# Altium PCB PCB2.PcbDoc
Units mil, origin at the board's own origin, x right, y up, seen from the top; angles counter-clockwise.
Board outline 10955.05 x 6878.87 mil, 2 copper layers (Top Layer, Bottom Layer); 48 components, 33 nets, 223 pads, 8 vias.
Unrouted connection lines stored in the file: 1.
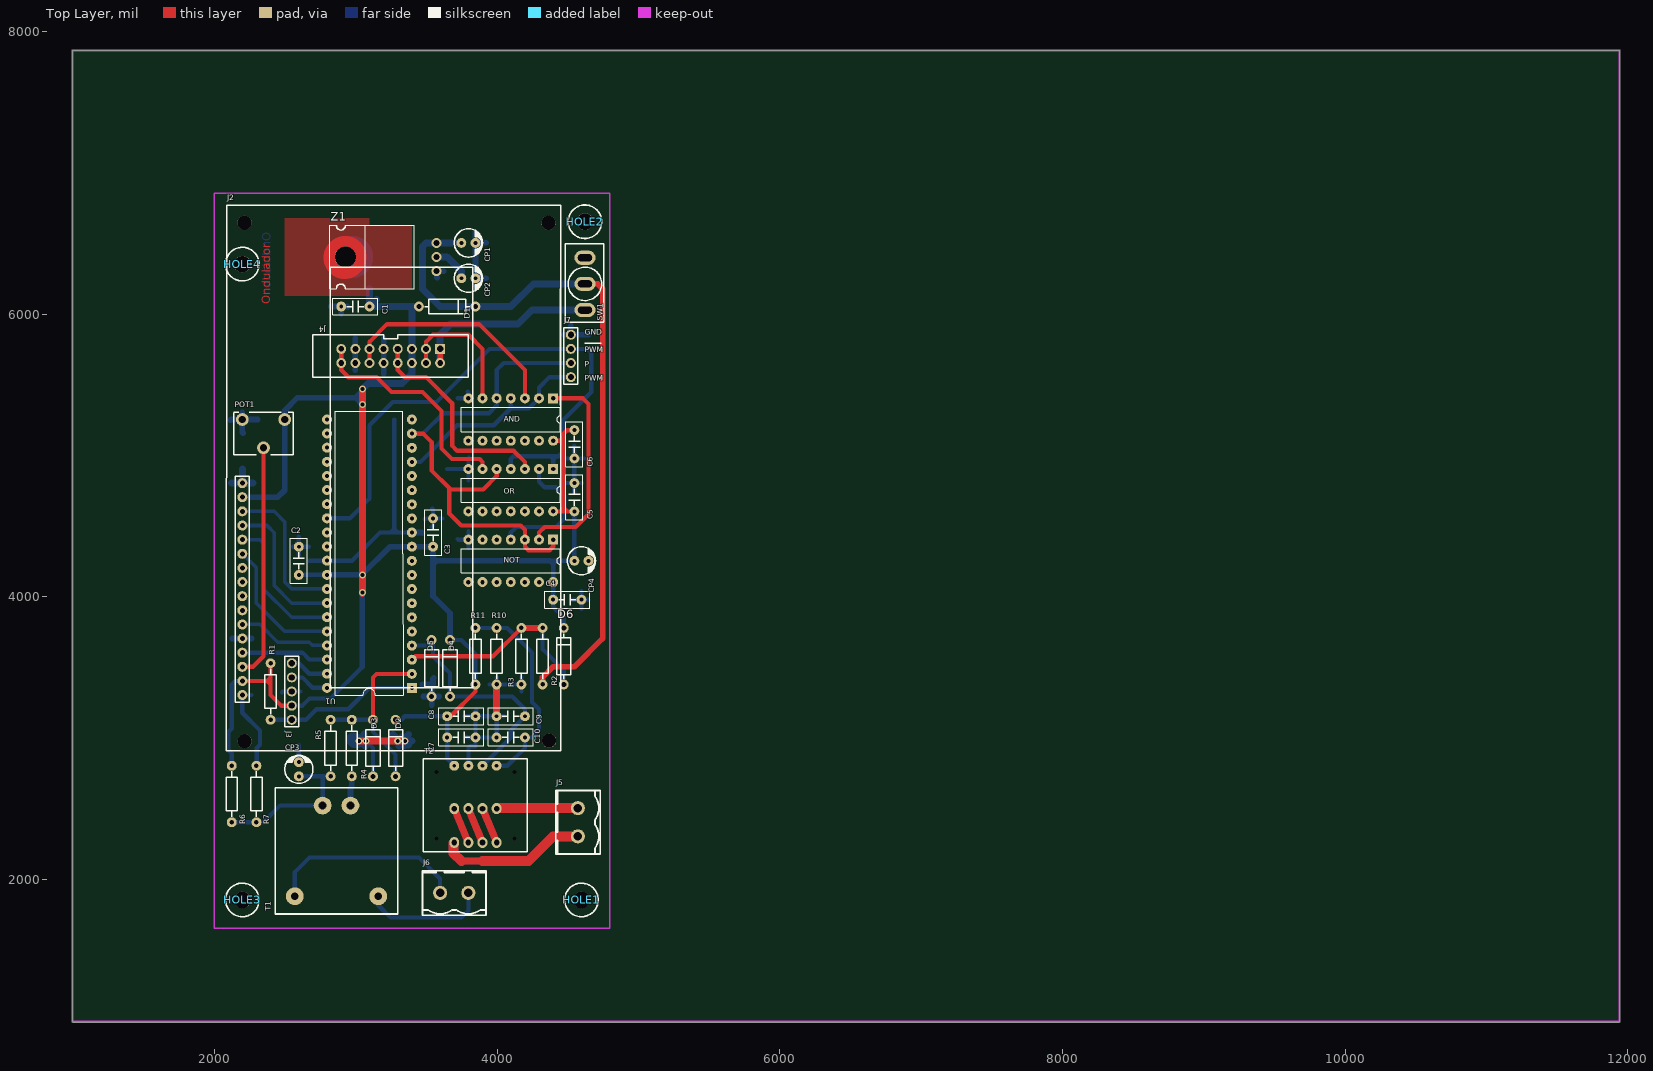
[diagram p0: Top Layer view]
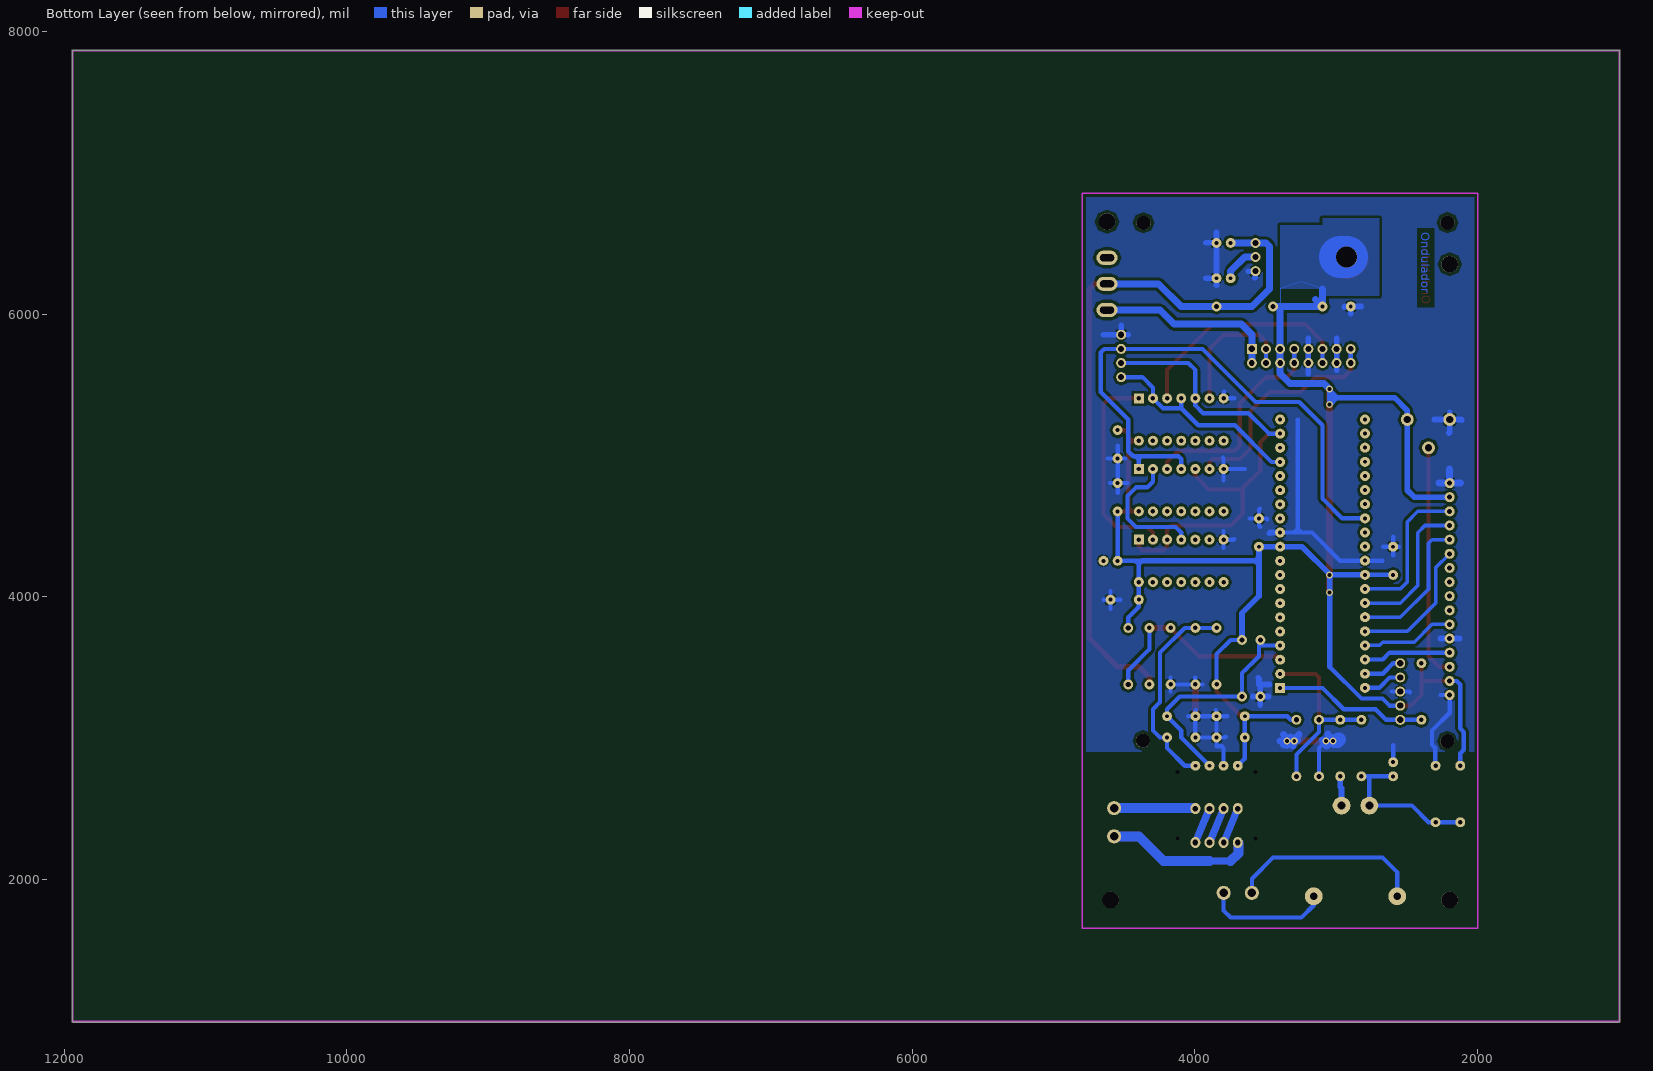
[diagram p1: Bottom Layer view, seen from below]

## Layer stack, top to bottom
Top Solder: solder mask 0.4, Solder Resist, Dk 3.5
Top Layer: signal copper 1.4
Dielectric 1: dielectric 12.6, FR-4, Dk 4.8
Bottom Layer: signal copper 1.4
Bottom Solder: solder mask 0.4, Solder Resist, Dk 3.5

## Board outline
991.18,996.73 cw(c994.98,1000) 989.97,1000 989.97,7865 cw(c994.98,7865) 994.98,7870.02 11940,7870.02 cw(c11940,7865) 11945.01,7865 11945.01,996.16 cw(c11940,996.16) 11940,991.15 996.16,991.15 cw(c996.16,996.16)

## Design rules (kind name [scope] priority, off if disabled: settings)
Clearance [All] p1: gap=20
PolygonConnect [All] p1: connectstyle=Relief reliefconductorwidth=10 reliefentries=4 polygonreliefangle="90 Angle" airgapwidth=10
RoutingVias [All] p1: holewidth=28 width=50 viastyle="Through Hole" minholewidth=28 minwidth=50 maxholewidth=28 maxwidth=50
SolderMaskExpansion [All] p1: expansion=4
UnpouredPolygon [All] p1: allowunpoured=FALSE
Width [All] p1: maxlimit=300 minlimit=15 preferedwidth=35
29 further rules are at their usual default settings.

## Components (designator, comment, footprint, x,y, rotation, side; value= is the part's Value field where it differs from the comment)
AND "I-7408" DIP14 4395,5405 r270 top
C1 "C" C2_200MILS 3095,6055 r180 top
C2 "C" C2_200MILS 2595,4155 r90 top
C3 "C" C2_200MILS 3545,4355 r90 top
C4 "C" C2_200MILS 4395,3980 r0 top
C5 "C" C2_200MILS 4545,4605 r90 top
C6 "C" C2_200MILS 4545,5180 r270 top
C7 "C" C2_200MILS 3645,3005 r0 top
C8 "47nF" C2_200MILS 3645,3155 r0 top
C9 "4.7nF" C2_200MILS 3995,3155 r0 top
C10 "47nF" C2_200MILS 4195,3005 r180 top
CP1 "CP" CP1_D5I5 3745,6505 r0 top
CP2 "CP" CP1_D5I5 3745,6255 r0 top
CP3 "CP" CP1_D5I5 2595,2730 r90 top
CP4 "CP" CP1_D5I5 4545,4255 r0 top
D1 "D" DO41 3445,6055 r0 top
D2 "D" DO41 3280,2730 r90 top
D3 "D" DO41 3120,2730 r90 top
D4 "D" DO41 3665,3295 r90 top
D5 "D" DO41 3535,3295 r90 top
D6 "D" DO41 4470,3380 r90 top
HOLE1 "HOLE" HOLE3_D6 4595,1855 r90 top
HOLE2 "HOLE" HOLE3_D6 4620,6655 r90 top
HOLE3 "HOLE" HOLE3_D6 2195,1855 r90 top
HOLE4 "HOLE" HOLE3_D6 2195,6355 r90 top
J2 "O_LCD_petit" O_LCDPETIT 2195,3305 r90 top
J3 "ICSP" CON5_2I54V 2545,3130 r180 top
J4 "CON16_2headers" CON16-2HEADERS 3595,5755 r270 top
J5 "CON2" CON2_5I08V_CP 4570,2505 r270 top
J6 "CON2" CON2_5I08V_CP 3795,1905 r180 top
J7 "CON4" CON4_2I54V 4520,5555 r180 top
NOT "I-7404" DIP14 4395,4405 r270 top
OR "I-7432" DIP14 4395,4905 r270 top
POT1 "POT1" PT15V 2495,5255 r180 top
R1 "R" R1/4 2395,3530 r270 top
R2 "R" R1/4 4320,3380 r90 top
R3 "R" R1/4 4170,3780 r270 top
R4 "R" R1/4 2970,2730 r90 top
R5 "R" R1/4 2820,3130 r270 top
R6 "R" R1/4 2120,2805 r270 top
R7 "R" R1/4 2295,2405 r90 top
R10 "R" R1/4 3995,3380 r90 top
R11 "R" R1/4 3845,3780 r270 top
SW1 "SW" SW1SPDT 4620,6030 r90 top
T1 "TRAFO_1P2S" TR_0.35/1/12 3295,1755 r90 top
T2 "Transducer 5-20A" "HXS 20-NP" 3795,2805 r0 top
U1 "I-PIC18F44K20" DIP40 3395,3355 r180 top
Z1 "Z-78MXX" TO220GDS_pla 3570,6505 r90 top

## Footprints (in the part's own frame and the unit in brackets; to place one, negate y for a bottom-side part, rotate by r counter-clockwise, add the part's x,y. Pads: shape width x height; smd on the part's side, far side on the other; paste and mask are expansions set on the pad)
C2_200MILS [mil]
  round 70 hole 27.56: 1(0,0) 2(200,0)
  silkscreen extent -60,-60 260,60
CON2_5I08V_CP [mm]
  round 2.54 hole 1.5: 1(0,0) 2(5.08,0)
  silkscreen extent -3.15,-4 8.24,4
CON4_2I54V [mm]
  round 1.8 hole 1.1: 1(0,0) 2(0,-2.54) 3(0,-5.08) 4(0,-7.62)
  silkscreen extent -1.27,-8.89 1.27,1.27
CON5_2I54V [mm]
  round 1.8 hole 1.1: 1(0,0) 2(0,-2.54) 3(0,-5.08) 4(0,-7.62) 5(0,-10.16)
  silkscreen extent -1.27,-11.43 1.27,1.27
CON16-2HEADERS [mil]
  rect 70.87x70.87 hole 47.24: 1(0,0)
  round 70 hole 40: 2(100,0) 4(100,-100) 6(100,-200) 8(100,-300) 10(100,-400) 12(100,-500) 14(100,-600) 15(0,-700) 16(100,-700)
  round 70.87 hole 43.31: 3(0,-100) 5(0,-200) 7(0,-300) 9(0,-400) 11(0,-500) 13(0,-600)
  silkscreen extent -100,-900 200,200
CP1_D5I5 [mil]
  round 70 hole 27.56: 1(0,0) 2(100,0)
  silkscreen extent -50,-100 150,100
DIP14 [mm]
  rect 1.8x1.8 hole 0.8: 1(0,0)
  round 1.8 hole 0.8: 2(0,-2.54) 3(0,-5.08) 4(0,-7.62) 5(0,-10.16) 6(0,-12.7) 7(0,-15.24) 8(7.62,-15.24) 9(7.62,-12.7) 10(7.62,-10.16) 11(7.62,-7.62) 12(7.62,-5.08) 13(7.62,-2.54) 14(7.62,0)
  silkscreen extent 1.63,-16.51 5.99,1.27
DIP40 [mm]
  rect 1.8x1.8 hole 0.7: 1(0,0)
  round 1.8 hole 0.7: 2(0,-2.54) 3(0,-5.08) 4(0,-7.62) 5(0,-10.16) 6(0,-12.7) 7(0,-15.24) 8(0,-17.78) 9(0,-20.32) 10(0,-22.86) 11(0,-25.4) 12(0,-27.94) 13(0,-30.48) 14(0,-33.02) 15(0,-35.56) 16(0,-38.1) 17(0,-40.64) 18(0,-43.18) 19(0,-45.72) 20(0,-48.26) 21(15.24,-48.26) 22(15.255,-45.745) 23(15.255,-43.205) 24(15.255,-40.665) 25(15.255,-38.125) 26(15.255,-35.585) 27(15.255,-33.045) 28(15.255,-30.505) 29(15.255,-27.965) 30(15.255,-25.425) 31(15.255,-22.885) 32(15.255,-20.345) 33(15.255,-17.805) 34(15.255,-15.265) 35(15.255,-12.725) 36(15.255,-10.185) 37(15.255,-7.645) 38(15.255,-5.105) 39(15.255,-2.565) 40(15.255,-0.025)
  silkscreen extent 1.58,-49.75 13.78,1.28
DO41 [mil]
  round 70 hole 36: 1(0,0) 2(400,0)
  silkscreen extent 40,-50 360,50
HOLE3_D6 [mm]
  round 3 hole 3 unplated: 1(0,0)
  silkscreen extent -3.02,-3.02 3.02,3.01
"HXS 20-NP" [mm]
  round 0 hole 0.7: 0(-5.73,-13.1) 0(-5.73,-1.1) 0(8.27,-13.1) 0(8.27,-1.1)
  oval 1.778x2 hole 1: 1(-2.54,-13.8) 2(-2.54,-7.7) 3(0,-13.8) 4(0,-7.7) 5(2.54,-13.8) 6(2.54,-7.7) 7(5.08,-13.8) 8(5.08,-7.7)
  round 1.778 hole 0.7: 9(-2.54,0) 10(0,0) 11(2.54,0) 12(5.08,0)
  silkscreen extent -8.08,-15.45 10.62,1.25
O_LCDPETIT [mm]
  round 2.54 hole 2.54 unplated: 0(-8.3,-0.425) 0(-8.2,-55.15) 0(84.9,-55.05) 0(84.915,-0.399)
  round 1.8 hole 0.9: 1(0,0) 2(2.54,0) 3(5.08,0) 4(7.62,0) 5(10.16,0) 6(12.7,0) 7(15.24,0) 8(17.78,0) 9(20.32,0) 10(22.86,0) 11(25.4,0) 12(27.94,0) 13(30.48,0) 14(33.02,0) 15(35.575,0) 16(38.1,0)
  silkscreen extent -10.05,-57.2 88.08,2.85
PT15V [mil]
  round 90 hole 51.18: 1(0,0) 2(150,200) 3(300,0)
  silkscreen extent -59,-51 360,248
R1/4 [mil]
  round 70 hole 32: 1(0,0) 2(400,0)
  silkscreen extent 40,-40 360,40
SW1SPDT [mil]
  oval 100x150 hole 50 slot 100 at 90 deg: 1(0,0) 2(185,0) 3(370,0)
  silkscreen extent -88,-133 470,138
TO220GDS_pla [mm]
  round 1.8 hole 1.1: 1(0,0) 2(-5.08,0) 3(-2.54,0)
  round 3.78 hole 3.78 unplated: 3(-2.54,16.4)
  silkscreen extent -8.2,4 3.16,19.2
TR_0.35/1/12 [mm]
  round 3.2 hole 1.4: 1(3.201,18.5) 2(19.501,13.5) 3(3.201,3.5) 4(19.501,8.5)
  silkscreen extent 0,0 22.7,22

## Part data
AND: "Cuadruple 2 input Schmitt trigger NAND gate"
C1 C2 C3 C4 C5 C6 C7: ";C?;C1206;C2_25x7i5;C4_15x5 ;C0805 ;Condensador baja potencia ;2"
C8 C9 C10: library part C, ";C?;C1206;C2_25x7i5;C4_15x5 ;C0805 ;Condensador baja potencia ;2"
CP1 CP2 CP3 CP4: ";CP? ;CP1_D5i5 ;CP2_D10i5 ;CP2_D13 ;CP4_D36 ;Condensador polarizado ;3"
D1 D2 D3 D4 D5 D6: ";D? ;SOD80;DO41 ;melf ;minimelf ; Diodo de señal o baja potencia ;8"
HOLE1 HOLE2 HOLE3 HOLE4: ";HOLE? ;HOLE3_D6 ; ; ;Agujero ;20"
J3: library part CON5, ";J? ;CON5 ;CON5_2i54VE_JST_B2PVH ;CON5_7I62_STL960-HG-3 ;CON5_2I54V;Conector de 5 pins simples ;17"
J4: ";J? ;CON5 ;CON5_2i54VE_JST_B2PVH ;CON5_7I62_STL960-HG-3 ;CON5_2I54V;Conector de 5 pins simples ;17"
J5 J6: ";J? ;CON2 ;CON2_2i54VE_JST_B2PVH ;CON2_7I62_STL960-HG-3 ;CON2_2I54V ;Conector de 2 pins simples ;17"
J7: ";J? ;CON4 ;CON4_2i54VE_JST_B2PVH ;CON4_7I62_STL960-HG-3 ;CON4_2I54V ;Conector de 4 pins simples ;17"
NOT: ";U? ;DIP-14 ; ; ; ;6xInversor trigger smith ;18"
OR: ";U? ;SOIC14 ; ; ; ; NOR x 4 ;18"
POT1: ";PT? ;PTV1 ;PT15V ;PTH ;PTH1 ;Potenciometro generico ;1"
R1 R2 R3 R4 R5 R6 R7 R10 R11: ";R? ;R1206 ;R1/4 ;R1/2 ;R0805 ;Resistencia baja potencia (<=1/2W) ;1"
SW1: ";SW? ; ; ; ; ;Switch ;"
T1: ";T? ;TR-TOR1P-2S ; ; ; ;Transformador con 2 secundarios \"2part\" ;6"
Z1: ";Z? ;TO220 ;SOT233 ;TO220H_2COM ; ;Regulador Lineal ;11"

## Via types
v1: diameter 50, hole 28, Top Layer to Bottom Layer, 8 vias

## Nets (pads, with @x,y where several pads share a name; then routed paths per layer and width w, separated by ;. In a path a pad name is that pad's centre, name@x,y a point inside that pad or via, vN(x,y) a via of type N, cw(c..) or ccw(c..) an arc to the next point about the centre after c; other vN are vias at no path point)
+5V: AND.14 C1.1 C2.1 C3.1 C4.1 C5.1 C6.1 C7.1 C8.1 CP2.1 CP4.1 D1.1 D2.2 D4.2 D6.2 J2.2 J2.15 J3.2 J4.5 J4.6 NOT.14 OR.14 POT1.1 R1.1 R6.1 R11.2 T2.9 U1.11 U1.32 Z1.3 | length 13690.1
  Top Layer w30: J2.2 2370,3405 ; R1.1 2395,3430 ; J3.2 2470,3230 2395,3305 2395,3380 ; C8.1 3670,3155 3845,3330 R11.2 ; OR.14 4445,4605 ; AND.14 4445,5105 ; C5.1 4495,4605 ; C6.1 4495,5180 4470,5155 4470,5130 ; 2370,3405 2395,3380 ; 2370,3405 2395,3405 ; 2370,3405 2395,3430 ; 2395,3380 2395,3405 ; 2395,3405 2395,3430 ; 4445,4605 4470,4630 ; 4445,4605 4495,4605 ; 4445,5105 4470,5080 ; 4445,5105 4470,5130 ; 4470,4630 4495,4605 ; 4470,4630 4470,5080 ; 4470,5080 4470,5130
  Top Layer w40: v1@3045,4020 v1(3045,4030)
  Top Layer w50: v1(3045,4030) v1(3045,4155.98) v1(3045,5360) v1(3045,5470)
  Top Layer w300: Z1.3@2919.33,6400 Z1.3@2924.33,6405
  Bottom Layer w30: R6.1 2120,2892.5 2095,2917.5 2095,3042.5 2120,3067.5 2120,3380 2145,3405 J2.2 ; J3.2 2620,3230 2670,3280 2820,3280 3045,3505 ; C2.1 2595.98,4155.98 U1.32 ; D2.2@3270,3130.59 3320.59,3130.59 3345,3155 C8.1 C7.1 3645,2855 T2.9 ; D4.2 3745,3695 3845,3595 R11.2 ; D6.2@4470,3805 4470,3855 4395,3930 C4.1 NOT.14 4395,4230 ; C5.1 CP4.1 4420,4255 ; 4395,4230 4370,4255 4420,4255 ; 4395,4230 4420,4255
  Bottom Layer w40: J2.15 2445.59,4705.59 2495,4755 POT1.1 2495,5320 2585,5410 2995,5410 ; U1.32 v1(3045,4155.98) 3045,3505 ; v1@3042.99,4157.99 3240,4355 U1.11 C3.1 3545,4280 ; v1(3045,5470) v1@3045,5460 ; D4.2 3665,3885 3545,4005 3545,4230 ; 4370,4255 3570,4255 ; 2995,5410 v1@3045,5460 ; 2995,5410 3045,5410 ; 2995,5410 v1(3045,5360) 3045,5410 ; 3045,5410 v1@3045,5460 ; 3545,4230 3545,4255 ; 3545,4230 3570,4255 ; 3545,4255 3545,4280 ; 3545,4255 3570,4255 ; 3545,4280 3570,4255
  Bottom Layer w50: v1(3045,5470) 3085,5510 3325,5510 3395,5580 J4.6 J4.5 3395,6055 ; 3095,6180 C1.1 ; 3145,6105 C1.1 ; D1.1 3395,6055 ; Z1.3@3570,6405 3645,6405 3745,6305 CP2.1 ; C1.1 3395,6055
  Bottom Layer w300: Z1.3@2924.33,6405 Z1.3@2970,6405
+12SW: CP1.1 D1.2 R2.1 SW1.2 Z1.1 | length 5056.8
  Top Layer w40: R2.1 4320,3430 4395,3505 4545,3505 4745,3705 4745,6180 4710,6215 SW1.2
  Bottom Layer w50: CP1.1 Z1.1 3495,6505 3470,6480 3470,6180 3595,6055 3720.59,6055 4095,6055 4255,6215 SW1.2
+12V: J4.1 J4.2 SW1.1 | length 1397.5
  Top Layer w40: J4.2 J4.1
  Bottom Layer w40: J4.2 J4.2@3595,5676.21
  Bottom Layer w50: J4.2@3595,5676.21 J4.1 3595,5855 3670,5930 4145,5930 4245,6030 SW1.1
A: AND.6 J4.3 J4.4 | length 1062.1
  Top Layer w30: J4.4 J4.3 3495,5805 3545,5855 3795,5855 3895,5755 AND.6
  Bottom Layer w30: J4.4 J4.3
AN12V: D6.1 R2.2 R3.1 U1.3 | length 1480.3
  Top Layer w30: U1.3 3420,3580 3970,3580 R3.1
  Top Layer w40: R3.1 R2.2
  Bottom Layer w30: R2.2 4320,3630 4470,3480 D6.1
AN230: D2.1 D3.2 R4.2 R5.1 U1.2 | length 1351.9
  Top Layer w30: D3.2@3120,3130.59 3120,3430 3145,3455 U1.2
  Bottom Layer w30: R5.1 2840.71,3130 2841.3,3130.59 3120,3130.59 3120,3044.33 3280,2884.33 D2.1
B: J4.15 J4.16 OR.6 | length 1724.5
  Top Layer w30: J4.15 J4.16 2895,5605 2945,5555 3145,5555 3250,5450 3470,5450 3605,5315 3605,5050 3679.57,4975.43 3824.17,4975.43 3824.61,4975 3875,4975 3895,4955 OR.6
  Bottom Layer w30: J4.16 J4.15
C: AND.3 J4.11 J4.12 | length 1711.4
  Top Layer w30: J4.12 J4.11@3095,5730 ; J4.11 3095,5805 3220,5930 3870,5930 4195,5605 AND.3
  Bottom Layer w30: J4.12 J4.11
CONT: J2.3 POT1.2 | length 1656.1
  Top Layer w30: J2.3 2270,3505 2345,3580 POT1.2
D: J4.7 J4.8 OR.3 | length 1645.6
  Top Layer w30: J4.7 J4.8 3295,5605 3345,5555 3495,5555 3680,5370 3680,5070 3715.43,5034.57 3824.17,5034.57 ; 3824.61,5035 3824.17,5034.57 ; OR.3 4195,4955 4115.43,5034.57 3824.17,5034.57
  Bottom Layer w30: J4.8 J4.7
D0: J2.14 U1.33 | length 1075.8
  Bottom Layer w25: J2.14 2420,4605 2495,4530 2495,4105 2544.02,4055.98 U1.33
D1: J2.13 U1.34 | length 1047.1
  Bottom Layer w25: J2.13 2370,4505 2420,4455 2420,4080 2544.02,3955.98 U1.34@2795,3955.98
D2: J2.12 U1.35 | length 1017.2
  Bottom Layer w25: J2.12 2320,4405 2345,4380 2345,4055 2544.02,3855.98 U1.35
D3: J2.11 U1.36 | length 973.3
  Bottom Layer w25: J2.11 2295,4205 2295,3955 2494.02,3755.98 U1.36
E: J2.6 U1.37 | length 661.1
  Bottom Layer w25: J2.6 2320,3805 2445,3680 2670,3680 2694.02,3655.98 U1.37
GND: AND.7 C1.2 C2.2 C3.2 C4.2 C5.2 C6.2 C7.2 C8.2 C9.1 C10.2 CP1.2 CP2.2 CP3.2 CP4.2 D3.1 D5.1 J2.1 J2.5 J2.16 J3.3 J4.9 J4.10 J4.13 J4.14 J7.4 NOT.7 OR.7 POT1.3 R3.2 R7.2 R10.1 T2.10 U1.12 U1.31 Z1.2 | length 10151.6
  Top Layer w50: v1(3020,2980) v1(3070,2980) v1(3295,2980) v1(3345,2980) ; C9.1 R10.1
  Bottom Layer w30: 2260,3305 J2.1 2195,3180 2320,3055 2320,2953.27 2296.73,2930 2296.73,2806.73 R7.2 ; 2475,3325 2480,3330 J3.3 2605,3330 ; 2553.36,4355 C2.2 ; CP3.2 2595,2950 ; 2595,4295 C2.2 ; 2595,4425 C2.2 ; 2665,4355 C2.2 ; 2670.98,4255.98 2970.98,4255.98 3170,4455 3245,4455 ; 3094.74,2984.74 3094.74,2955.26 3120,2930 D3.1 ; 3270,5255 3270,4480 ; U1.12 3295,4455 ; 3485,4550 3490,4555 C3.2 ; 3535,4495 3545,4505 C3.2 ; C3.2@3540,4550 C3.2 ; 3540,4625 3545,4620 C3.2 ; 3610,4555 C3.2 ; 3645,4905 OR.7 ; 3720,4410 3725,4405 NOT.7 ; 3720,5405 AND.7 3795,5447.11 3790,5452.11 ; 3770,3155 C8.2 ; 3780,3010 3785,3005 C7.2 ; T2.10 3795,2930 3807.5,2942.5 3845,2942.5 C7.2 ; 3795,4345 NOT.7 ; 3795,4465 NOT.7 ; 3795,4825 OR.7 ; 3800,4985 3795,4980 OR.7 ; 3850,3197.84 3845,3192.84 C8.2 ; 3945,3380 R10.1 ; 3990,3197.84 3995,3192.84 C9.1 ; 3995,3430 R10.1 ; 4045,3155 C9.1 ; 4170,3330 R3.2 ; 4170,3430 R3.2 ; 4475,4805 C5.2 ; 4490.71,4980 C6.2 ; 4525,3980 C4.2 ; 4545,4735 C5.2 ; 4545,5070 C6.2 ; 4595,3915 C4.2 ; 4595,4040 C4.2 ; 4600,4805 C5.2 ; 4615,4980 C6.2 ; 4645,3980 C4.2 ; 3245,4455 3270,4480 ; 3245,4455 3295,4455 ; 3270,4480 3295,4455 ; C7.2 C10.2 C9.1 ; C7.2 C8.2 ; C8.2 C9.1 ; R10.1 R3.2 ; C5.2 C6.2
  Bottom Layer w40: 2110,5250 2115,5255 POT1.3 ; 2125,3705 J2.5 2260,3705 ; 2195,5305 POT1.3 ; 2200,5160 2195,5165 POT1.3 ; 2305,5255 POT1.3 ; 2820,6055 C1.2 ; 2895,6005 C1.2 ; 2941.64,6050 2936.64,6055 C1.2 ; 2995,5605 J4.14 J4.13 2995,5830 ; 3195,5580 J4.10 J4.9 3195,5830 ; U1.12 3465,4455 3470,4450 ; 3470.43,3380 3535,3380 3535,3315 D5.1@3545,3305 ; 3475,3295 D5.1 ; 3535,3235 D5.1 ; 3545,3380 3545,3421.64 3550,3426.64 ; 3575,6257.89 3570,6262.89 Z1.2 3620,6305 ; 3590,3295 D5.1 ; 3845,6205 CP2.2 ; 3845,6580 CP1.2 ; 3920,6255 CP2.2 ; 3920,6505 CP1.2 ; 4470,5855 J7.4 ; 4520,5920 J7.4 ; 4645,5855 J7.4 ; CP2.2 CP1.2
  Bottom Layer w50: 2120,4805 J2.16 ; 2195,4905 J2.16 ; 2270,4805 J2.16 ; v1@3010,2980 v1(3020,2980) v1(3070,2980) ; 3055,3030 3055,2995 v1(3070,2980) ; 3065,2944.19 3070,2949.19 v1(3070,2980) ; 3260,3025 3295,2990 v1(3295,2980) ; v1@3272.02,2987.83 3287.17,2987.83 v1(3295,2980) ; v1@3287.43,2972.43 v1(3295,2980) ; 3305,2944.19 3305,2970 v1(3295,2980) ; 3321.79,3006.79 v1(3295,2980) ; 3345,2949.19 v1(3345,2980) ; 3370,3025 3345,3000 v1@3345,2990 ; 3371.79,2953.21 v1(3345,2980) ; 3395,2980 v1(3345,2980) ; v1(3070,2980) 3090,2980 3094.74,2984.74 3094.48,2985 3075,2985 v1(3070,2980) ; v1(3295,2980) 3335,2980 v1@3345,2990 ; v1(3345,2980) v1@3345,2990
  Bottom Layer w100: 2980,2990 2990,2980 v1@3010,2980
IOUT: C9.2 D4.1 D5.2 T2.11 U1.4 | length 1996.6
  Bottom Layer w30: U1.4 3545,3655 ; 3545,3655.59 3545,3580 3665,3460 ; 3635,3490 3665,3460 ; 3720,3295 4022.35,3295 ; T2.11 4095,3005 4095,3055 C9.2 4195,3205 4105,3295 4022.35,3295 ; 3665,3460 D4.1 4022.35,3295
MCLR: J3.1 R1.2 U1.1 | length 1093.2
  Bottom Layer w30: R1.2 J3.1 2645,3130 2720,3205 2945,3205 3095,3355 U1.1
NetAND_1: AND.1 NOT.2 | length 1500.4
  Top Layer w30: NOT.2 4295,4455 4335,4495 4555,4495 4645,4585 4645,5365 4605,5405 AND.1
NetCP3_1: CP3.1 R5.2 R6.2 R7.1 T1.2 | length 1136.4
  Bottom Layer w30: R6.2 R7.1 2345,2405 2462.77,2522.77 T1.2 2763.5,2723.5 2770,2730 ; CP3.1 2770,2730 ; R5.2@2813.5,2723.5 R5.2 2770,2730
NetJ5_1: J5.1 T2.8 | length 1141.7
  Top Layer w50: T2.8@3999.9,2506.75 T2.8@4001.65,2505
  Top Layer w70: T2.8@4001.65,2505 J5.1
  Bottom Layer w50: T2.8@3999.9,2506.75 T2.8@4001.65,2505
  Bottom Layer w70: T2.8@4001.65,2505 J5.1
NetJ5_2: J5.2 T2.1 | length 2094
  Top Layer w50: 3745,2130 3895,2130
  Top Layer w70: T2.1@3690.1,2256.79 3690.1,2184.9 3745,2130 ; 3895,2130 4220,2130 4395,2305 J5.2
  Bottom Layer w50: 3745,2130 3895,2130
  Bottom Layer w70: T2.1@3690.1,2256.79 3690.1,2184.9 3745,2130 ; 3895,2130 4220,2130 4395,2305 J5.2
NetJ6_1: J6.1 T1.3 | length 883.1
  Bottom Layer w30: T1.3 3157.2,1817.8 3245,1730 3745,1730 3795,1780 J6.1
NetJ6_2: J6.2 T1.1 | length 1403.9
  Bottom Layer w30: T1.1 2566.65,2051.65 2670,2155 3445,2155 3595,2005 J6.2
NetNOT_4: NOT.4 OR.2 | length 942.8
  Bottom Layer w30: NOT.4 4095,4455 4135,4495 4415,4495 4475,4555 4475,4715 4415,4775 4335,4775 4295,4815 OR.2
NetR4_1: R4.1 T1.4 | length 211.2
  Bottom Layer w40: T1.4 2960.35,2645.35 2970,2655 R4.1
NPWM: J7.3 OR.1 OR.4 U1.28 | length 4062.3
  Bottom Layer w30: U1.28 2955.98,4555.98 3095,4695 3095,5215 3260,5380 3570,5380 3945,5755 4640,5755 4665,5730 4665,5450 4470,5255 4470,5030 4435,4995 4420,4995 ; OR.4 4095,4975 4115,4995 4375,4995 ; OR.1 4395,4975 ; 4375,4995 4395,4975 ; 4375,4995 4420,4995 ; 4395,4975 4400,4975 4420,4995
P: AND.5 J7.2 NOT.1 NOT.3 OR.5 U1.19 | length 3587.9
  Top Layer w30: U1.19 3475,5155 3535,5095 3535,4895 3660,4770 3660,4590 3745,4505 4165,4505 4195,4475 NOT.3 4195,4355 4220,4330 4370,4330 4395,4355 NOT.1 ; 3670,4760 3900,4760 3995,4855 OR.5
  Bottom Layer w30: U1.19 3475,5155 3620,5300 3940,5300 3995,5355 AND.5 3995,5605 4045,5655 J7.2
PGC: J3.5 U1.39 | length 280.1
  Bottom Layer w30: J3.5 2595,3530 2669.02,3455.98 U1.39
PGD: J3.4 U1.40 | length 280.1
  Bottom Layer w30: J3.4 2620,3430 2694.02,3355.98 U1.40
PWM: AND.2 AND.4 J7.1 U1.17 | length 1487.8
  Bottom Layer w30: U1.17 3455,4955 3715,5215 3975,5215 4095,5335 ; AND.4 4095,5335 ; J7.1 4370,5555 4295,5480 AND.2 4294.61,5405 4224.17,5334.57 4165.39,5334.57 4164.96,5335 4095,5335
RS: J2.4 U1.38 | length 620.3
  Bottom Layer w30: J2.4 2620,3605 2669.02,3555.98 U1.38@2795,3555.98
VREFTR: C10.1 R10.2 R11.1 T2.12 | length 1490.7
  Bottom Layer w30: R11.1 R10.2 4070,3780 4245,3605 4245,3255 4295,3205 4295,3055 4245,3005 C10.1 4195,2930 4070,2805 T2.12
pads on no net: AND.8 AND.9 AND.10 AND.11 AND.12 AND.13 HOLE1.1 HOLE2.1 HOLE3.1 HOLE4.1 J2.0 J2.7 J2.8 J2.9 J2.10 NOT.5 NOT.6 NOT.8 NOT.9 NOT.10 NOT.11 NOT.12 NOT.13 OR.8 OR.9 OR.10 OR.11 OR.12 OR.13 SW1.3 T2.0 T2.2 T2.3 T2.4 T2.5 T2.6 T2.7 U1.5 U1.6 U1.7 U1.8 U1.9 U1.10 U1.13 U1.14 U1.15 U1.16 U1.18 U1.20 U1.21 U1.22 U1.23 U1.24 U1.25 U1.26 U1.27 U1.29 U1.30
copper on no net: | length 1560.9
  Top Layer w50: 3695,2501.85 3795,2261.69 ; 3795,2501.85 3895,2261.69 ; 3895,2501.85 3995,2261.69
  Bottom Layer w50: 3695,2501.85 3795,2261.69 ; 3795,2501.85 3895,2261.69 ; 3895,2501.85 3995,2261.69

## Polygon pours and split planes (outlines as drawn)
+5V on Bottom Layer "Bottom Layer-No Net" (solid, shelved, pour order 6): 3395,6180 3395,6055 3095,6055 3095,6180 3245,6230
+5V on Bottom Layer "Bottom Layer-No Net" (solid, pour order 4): 3395,6180 3395,6630 3095,6630 3095,6680 2695,6680 2695,6130 3095,6130 3095,6180 3395,6180
GND on Bottom Layer "Bottom Layer-No Net" (solid, remove dead copper, pour order 2): 4795,2905 4795,6855 1995,6855 1995,2905
+5V on Top Layer "Bottom Layer-No Net" (solid, pour order 16): 3395,6180 3395,6630 3095,6630 3095,6680 2695,6680 2495,6680 2495,6405 2495,6130 2695,6130 3095,6130 3095,6180

## Keep-outs
Keep-Out Layer:
  lines w10: 994.98,1000 994.98,7865 11940,7865 11940,996.16 996.16,996.16 ; 1995,1655 1995,6855 4795,6855 4795,1655 1995,1655

## Other copper
Top Layer:
  text "Ondulador" at 2394,6070 h60 r90
Bottom Layer:
  text "Ondulador" at 2395,6580 h60 r90

## Silkscreen, mask and mechanical layers (free items; w line width, h text height)
Top Overlay:
  lines w10: 4445,5355 4445,6180 ; 4620,5795 4735,5795
  text "GND" at 4620,5855 h40
  text "PWM" at 4620,5730 h40
  text "P" at 4620,5630 h40
  text "PWM" at 4620,5530 h40